# Altium PCB Charging_Dock_PCB.PcbDoc (part 2 of 2)
Units mm, origin at the board's own origin, x right, y up, seen from the top; angles counter-clockwise.
Board outline 320 x 215 mm, 2 copper layers (Top Layer, Bottom Layer); 121 components, 72 nets, 386 pads, 90 vias.
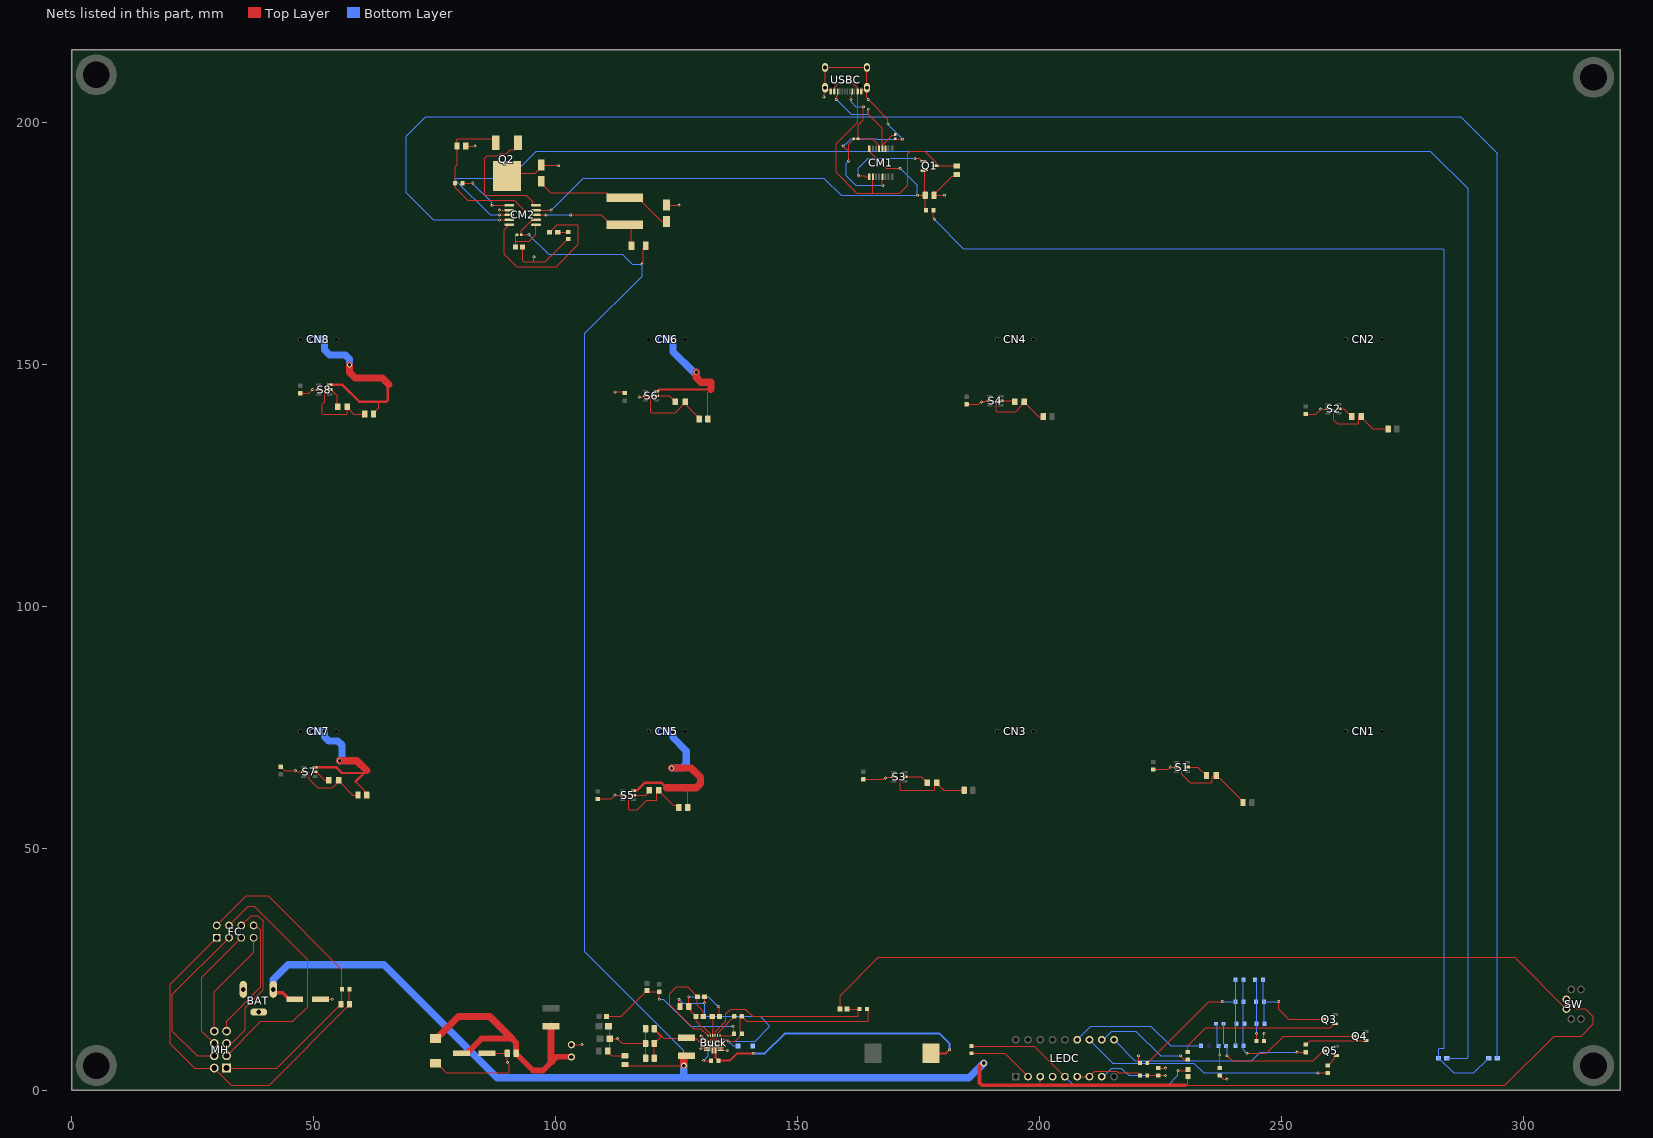
[diagram p2: the nets of this part, all layers, seen from the top]

## Via types
v1: diameter 0.6, hole 0.3, Top Layer to Bottom Layer, 80 vias
v2: diameter 1, hole 0.7, Top Layer to Bottom Layer, 8 vias
v3: diameter 1.27, hole 0.711, Top Layer to Bottom Layer, 1 vias
v4: diameter 1.3, hole 0.8, Top Layer to Bottom Layer, 1 vias

## Nets (pads, with @x,y where several pads share a name; then routed paths per layer and width w, separated by ;. In a path a pad name is that pad's centre, name@x,y a point inside that pad or via, vN(x,y) a via of type N, cw(c..) or ccw(c..) an arc to the next point about the centre after c; other vN are vias at no path point) (continued)
5V_FUSED5: C18.1 CN5.2 CN5.3 S5.6 | length 41.5
  Top Layer w0.254: 126.492,62.484 127.276,61.7 C18.1@127.276,58.42
  Top Layer w0.5: S5.6@116.09,61.91 116.106,61.926 116.79,61.926 118.364,63.5 121.92,63.5 122.936,62.484
  Top Layer w1.5: 122.936,62.484 126.492,62.484 129.08,62.484 129.959,63.363 129.959,64.605 128.016,66.548 v2(123.952,66.548)
  Bottom Layer w1.5: CN5.3@121.75,74.143 CN5.2@124.25,74.143 124.25,72.854 127,70.104 127,67.427 126.121,66.548 v2(123.952,66.548)
5V_FUSED6: C23.1 CN6.2 CN6.3 S6.6 | length 35.3
  Top Layer w0.254: C23.1@131.456,138.684 131.456,144.156 132.08,144.78
  Top Layer w0.5: S6.6@120.869,144.436 121.139,144.436 121.155,144.452 121.155,144.487 121.448,144.78 132.08,144.78
  Top Layer w1.5: v2(129.032,148.336) 129.032,147.32 130.052,146.3 132.08,146.3 132.08,144.78
  Bottom Layer w1.5: CN6.3@121.75,155.143 CN6.2@124.25,155.143 124.25,152.61 128.524,148.336 v2(129.032,148.336)
5V_FUSED7: C25.1 CN7.2 CN7.3 S7.6 | length 35.5
  Top Layer w0.254: 58.674,63.754 60.594,61.834 60.594,61.326 C25.1@60.96,60.96
  Top Layer w0.5: S7.6@50.257,66.712 54.7,66.712 55.88,65.532 60.452,65.532 ; 58.674,63.754 60.452,65.532 ; 60.96,66.04 60.452,65.532
  Top Layer w1.5: v2(55.372,68.072) 58.928,68.072 60.96,66.04
  Bottom Layer w1.5: CN7.3@49.75,74.143 CN7.2@52.25,74.143 52.25,73.015 53.129,72.136 55.001,72.136 55.88,71.257 55.88,68.58 v2(55.372,68.072)
5V_FUSED8: C27.1 CN8.2 CN8.3 S8.6 | length 42.6
  Top Layer w0.254: C27.1@62.368,139.7 62.368,139.88 63.5,141.012 63.5,142.24
  Top Layer w0.5: S8.6@53.34,145.73 55.946,145.73 59.436,142.24 63.5,142.24 65.024,142.24 65.317,142.533 65.317,146.011 65.317,146.021 65.35,146.054
  Top Layer w1.5: v2(57.404,149.86) 57.404,148.336 58.586,147.154 64.174,147.154 65.317,146.011 65.532,145.796
  Bottom Layer w1.5: CN8.3@49.75,155.143 CN8.2@52.25,155.143 52.25,152.982 53.34,151.892 56.525,151.892 57.404,151.013 v2(57.404,149.86)
5V_FUSEDPI: C34.2 C35.1 J1.C PF2.2 Pi.1 | length 56.2
  Top Layer w1.2: C35.1@80.512,7.62 81.662,7.62 84.71,10.668 90.932,10.668 91.787,9.813 91.787,7.575 95.298,4.064 97.37,4.064 99.231,5.925 100.221,6.915 103.206,6.915 Pi.1@103.264,6.858
  Top Layer w1.5: J1.C@75.184,10.678 75.384,10.678 79.946,15.24 86.36,15.24 90.932,10.668 ; PF2.2@99.06,13.208 99.06,6.096 99.231,5.925
25P: DR.C LEDC.13 | length 28.4
  Bottom Layer w0.254: LEDC.13@207.772,10.414 210.566,13.208 223.012,13.208 227.076,9.144 DR.C@233.378,9.144
100P: DG1.C DG2.C DG3.C DG4.C R25.1 | length 37.2
  Top Layer w0.254: R25.1@222.241,5.588 222.241,5.617 222.517,5.893 222.546,5.893 234.941,18.288 v1(237.744,18.288)
  Bottom Layer w0.254: v1(237.744,18.288) DG3.C@240.49,18.288 ; DG1.C@240.49,9.144 240.49,13.716 DG3.C@240.49,18.288 ; DG2.C@240.49,22.86 DG3.C@240.49,18.288
AGND: Buck.12 C2.1 C3.1 NT1.1 R2.2 R5.2 R8.2 | length 75.4
  Top Layer w0.2: v1(125.476,18.796) 125.476,17.514 C3.1@125.718,17.272 ; v1(130.783,18.007) R2.2@130.783,19.304
  Top Layer w0.254: Buck.12@134.529,10.547 135.155,10.547 135.542,10.16 v1(135.636,10.16) 137.16,10.16 137.998,10.998 137.998,11.581 R5.2@138.101,11.684 ; R5.2@138.101,11.581 138.101,14.863 138.448,15.21 C2.1@138.448,15.24 139.464,14.224 164.443,14.224 164.592,14.373 164.592,16.501 R8.2@164.329,16.764
  Bottom Layer w0.254: v1(125.476,18.796) 126.265,18.007 v1(130.783,18.007) 130.783,15.521 131.064,15.24 142.24,15.24 144.167,13.313 144.167,13.103 141.2,10.136 v1@135.66,10.136 ; v1(135.636,10.16) v1@135.66,10.136 ; NT1.1@137.668,9.144 136.652,9.144 v1@135.66,10.136
BAT: BAT.1 C1.1 C30.2 CM2.7 LEDC.3 PF1.1 R19.2 R32.1 RCS.2 SW.5 | length 546.5
  Top Layer w0.254: v1(94.488,176.784) R19.2@92.889,176.784 92.889,177.544 95.193,179.848 CM2.7@95.937,179.848 ; C30.2@114.3,5.312 114.589,5.023 126.435,5.023 v3(126.492,5.08) ; v1(117.856,170.688) 117.856,170.963 118.134,171.241 118.134,174.008 RCS.2@118.611,174.485 ; 200.152,1.016 LEDC.3@200.152,2.794 ; 230.053,1.016 230.632,1.016 ; R32.1@230.632,2.821 230.632,1.016 ; SW.5@308.864,18.764 310.755,16.873 312.779,16.873 314.452,15.2 314.452,13.716 311.912,11.176 306.324,11.176 296.164,1.016 230.632,1.016
  Top Layer w0.8: BAT.1@41.656,20.828 41.656,20.461 41.979,20.138 43.606,20.138 44.948,18.796 C1.1@46.098,18.796 ; v4(188.468,5.588) 188.333,5.588 188.083,5.338 188.07,5.338 187.602,4.869 187.602,1.485 188.07,1.016 200.152,1.016 230.053,1.016
  Top Layer w1.5: v3(126.492,5.08) PF1.1@126.492,6.604
  Bottom Layer w0.254: v1(94.488,176.784) 98.552,172.72 113.792,172.72 115.824,170.688 v1(117.856,170.688) 117.856,168.148 106.063,156.355 106.063,28.557 126.492,8.128 v3(126.492,5.08)
  Bottom Layer w1.5: BAT.1@41.656,21.828 41.656,22.86 44.704,25.908 64.516,25.908 87.884,2.54 127,2.54 ; v3(126.492,5.08) 126.492,3.048 127,2.54 ; v4(188.468,5.588) 185.42,2.54 127,2.54
BOOT: Buck.1 C5.1 | length 9.3
  Top Layer w0.25: v1(130.048,11.176) 130.252,11.176 130.881,10.547 Buck.1@131.056,10.547 ; v1(130.556,6.096) C5.1@132.08,6.096
  Bottom Layer w0.25: v1(130.048,11.176) 132.037,9.187 132.037,8.98 131.572,8.515 131.572,7.112 v1(130.556,6.096)
CC1: CM1.P$13 R21.1 USBC.A5 | length 17.8
  Top Layer w0.2: 165.451,196.596 166.748,195.299 166.748,194.664 CM1.P$13@166.848,194.564
  Top Layer w0.254: v1(161.036,204.724) 161.036,205.417 161.217,205.598 USBC.A5@161.217,206.248 ; v1(163.576,203.2) 163.576,200.515 162.485,199.424 R21.1@162.485,196.596 165.451,196.596 165.526,196.596 165.567,196.555
  Bottom Layer w0.254: v1(161.036,204.724) 161.036,204.216 162.052,203.2 v1(163.576,203.2)
CC2: CM1.P$12 R22.1 USBC.B5 | length 23
  Top Layer w0.254: v1(157.988,204.724) 158.054,204.79 158.054,205.392 158.283,205.621 USBC.B5@158.283,205.74 ; v1(164.592,202.692) 164.592,201.676 167.498,198.77 CM1.P$12@167.498,195.237 ; CM1.P$12@167.398,194.989 167.398,195.137 CM1.P$12@167.498,195.237 ; CM1.P$12@167.498,194.564 CM1.P$12@167.498,195.237 ; R22.1@170.18,197.462 170.18,197.449 170.037,197.306 169.566,197.306 CM1.P$12@167.498,195.237
  Bottom Layer w0.254: v1@158.105,204.607 161.036,201.676 164.443,201.676 164.592,201.825 v1(164.592,202.692)
CHRG: CM2.3 DC.1 | length 413.4
  Top Layer w0.254: v1(88.392,180.848) CM2.3@90.424,180.848
  Bottom Layer w0.254: v1(88.392,180.848) 86.448,180.848 79.187,188.109 79.187,188.319 79.336,188.468 90.424,188.468 96.012,194.056 280.775,194.056 288.544,186.287 288.544,6.753 288.395,6.604 DC.1@284.148,6.604
COM: CM2.5 R18.2 | length 35.3
  Top Layer w0.254: CM2.5@90.424,178.848 89.408,177.832 89.408,172.72 91.948,170.18 100.076,170.18 104.648,174.752 104.648,178.667 104.499,178.816 100.292,178.816 98.768,177.292 R18.2@98.718,177.292
DONE: CM2.4 DD.1 | length 452.6
  Top Layer w0.254: v1(88.4,179.84) 90.416,179.84 CM2.4@90.424,179.848
  Bottom Layer w0.254: v1(88.4,179.84) 74.668,179.84 69.088,185.42 69.088,197.119 73.137,201.168 287.02,201.168 294.544,193.644 DD.1@294.544,6.604
Drain: D1.A Q2.2 | length 11.9
  Top Layer w0.2: D1.A@97.028,191.162 100.322,191.162 100.476,191.008 v1(100.584,191.008)
  Top Layer w0.254: Q2.2@89.923,188.901 90.506,189.484 95.763,189.484 97.028,190.749 D1.A@97.028,191.162
EN: Buck.15 R3.2 R8.1 | length 38
  Top Layer w0.254: Buck.15@132.956,11.272 132.956,12.052 135.128,14.224 135.128,15.748 136.144,16.764 139.192,16.764 140.716,15.24 162.411,15.24 162.56,15.389 162.56,16.501 R8.1@162.823,16.764 R3.2@160.247,16.764
FB: Buck.13 C4.2 R5.1 R6.1 R7.2 | length 37.1
  Top Layer w0.2: R6.1@118.872,20.601 119.153,20.32 C4.2@121.412,20.32
  Top Layer w0.254: R7.2@110.463,15.24 113.521,15.24 118.872,20.591 R6.1@118.872,20.601 ; v1(121.412,18.796) C4.2@121.412,20.32 ; Buck.13@133.956,11.272 133.956,11.244 133.958,11.242 136.376,11.242 R5.1@136.818,11.684 ; v1(136.652,13.208) 136.652,13.114 136.848,12.918 R5.1@136.848,11.684
  Bottom Layer w0.254: v1(121.412,18.796) 122.285,18.796 127.873,13.208 v1(136.652,13.208)
ILIM1: R9.1 S1.5 | length 4.6
  Top Layer w0.2: S1.5@230.597,66.778 232.7,66.778 234.424,65.054 R9.1@234.424,65.024
ILIM2: R10.1 S2.5 | length 3.2
  Top Layer w0.2: S2.5@261.886,140.782 262.836,140.782 264.396,139.222 R10.1@264.396,139.192
ILIM3: R11.1 S3.5 | length 5.1
  Top Layer w0.2: S3.5@172.177,64.746 175.568,64.746 176.784,63.53 R11.1@176.784,63.5
ILIM4: R13.1 S4.5 | length 2.9
  Top Layer w0.2: S4.5@191.989,142.47 194.57,142.47 R13.1@194.8,142.24
ILIM5: R12.1 S5.5 | length 3.6
  Top Layer w0.2: S5.5@116.09,60.96 118.662,60.96 119.344,61.642 R12.1@119.344,61.672
ILIM6: R14.1 S6.5 | length 4.4
  Top Layer w0.2: S6.5@120.869,143.486 123.496,143.486 124.742,142.24 R14.1@124.792,142.24
ILIM7: R15.1 S7.5 | length 3.5
  Top Layer w0.2: S7.5@50.257,65.762 50.423,65.596 50.745,65.596 52.333,64.008 R15.1@53.068,64.008
MODE: Buck.18 R1.1 R2.1 | length 24.7
  Top Layer w0.25: R1.1@130.502,15.24 130.502,16.31 129.313,17.499 R2.1@129.313,19.304 129.303,19.304 127.271,21.336 124.968,21.336 123.548,19.916 123.548,17.676 128.524,12.7 130.028,12.7 131.281,11.447 131.456,11.447 Buck.18@131.456,11.272
NetC28_1: C28.1 CM2.1 | length 11.9
  Top Layer w0.254: C28.1@80.772,187.452 v1(82.804,187.452) ; v1(86.868,182.848) CM2.1@90.424,182.848
  Bottom Layer w0.254: v1(82.804,187.452) 86.802,183.454 86.802,182.914 v1(86.868,182.848)
NetC31_2: C31.2 R18.1 | length 2.2
  Top Layer w0.2: R18.1@100.418,177.292 C31.2@102.616,177.292
NetCM2_6: CM2.6 R19.1 R20.2 | length 9.6
  Top Layer w0.254: R20.2@91.721,174.244 91.721,175.369 ; R19.1@92.023,176.784 92.01,176.784 91.721,176.495 91.721,175.369 ; CM2.6@95.937,178.848 95.937,176.709 94.597,175.369 91.721,175.369
NetCM2_8: CM2.8 L2.2 RCS.1 | length 24.4
  Top Layer w0.254: CM2.8@95.937,180.848 v1(98.044,180.848) ; v1(103.124,180.848) 109.418,180.848 111.45,178.816 L2.2@114.3,178.816 114.881,178.816 115.654,178.043 RCS.1@115.654,174.485
  Bottom Layer w0.254: v1(98.044,180.848) v1(103.124,180.848)
NetCM2_10: CM2.10 Q2.1 | length 27.9
  Top Layer w0.254: Q2.1@92.208,195.748 92.208,195.048 91.535,194.375 90.59,194.375 89.763,193.548 88.534,193.548 88.026,193.04 85.852,193.04 85.344,192.532 85.344,185.061 85.493,184.912 93.98,184.912 95.32,183.572 95.32,182.973 95.445,182.848 CM2.10@95.937,182.848
NetD1_C: D1.C D2.C L2.1 | length 29.7
  Top Layer w0.254: D1.C@97.028,187.806 97.028,187.394 99.002,185.42 110.528,185.42 110.677,185.271 110.677,185.189 111.45,184.416 117.15,184.416 117.923,183.643 117.923,183.441 121.839,179.525 D2.C@122.936,179.525
NetDC_2: DC.2 DD.2 R17.1 | length 291
  Top Layer w0.254: R17.1@178.072,181.864 178.072,180.366 178.308,180.13 v1(178.308,180.037)
  Bottom Layer w0.254: v1(178.308,180.037) 178.308,179.832 184.263,173.877 283.456,173.877 283.605,173.728 283.605,8.636 282.597,8.636 282.448,8.487 DC.2@282.448,6.604 282.498,6.604 285.546,3.556 289.746,3.556 DD.2@292.794,6.604
NetDG1_A: DG1.A DG2.A DG3.A DG4.A Q4.3 | length 39.1
  Top Layer w0.254: v1(242.824,7.62) 246.888,7.62 250.444,11.176 Q4.3@264.957,11.176
  Bottom Layer w0.254: DG2.A@242.11,22.86 DG3.A@242.11,18.288 242.11,13.716 DG1.A@242.11,9.144 242.11,8.334 v1(242.824,7.62)
NetFC_3: FC.3 MH.4 | length 34.9
  Top Layer w0.254: MH.4@29.464,7.112 25.908,7.112 20.828,12.192 20.828,19.812 FC.3@32.512,31.496
NetFC_4: FC.4 MH.3 | length 53.1
  Top Layer w0.254: MH.3@32.004,7.112 39.116,14.224 45.72,14.224 48.768,17.272 48.768,26.924 37.697,37.995 36.471,37.995 FC.4@32.512,34.036
NetFC_5: FC.5 MH.6 | length 26.3
  Top Layer w0.254: MH.6@29.464,9.652 26.924,12.192 26.924,23.368 FC.5@35.052,31.496
NetFC_6: FC.6 MH.5 | length 34.8
  Top Layer w0.254: MH.5@32.004,9.652 32.269,9.917 33.285,9.917 35.864,12.496 35.864,17.068 39.56,20.764 39.56,34.967 38.459,36.068 37.084,36.068 FC.6@35.052,34.036
NetFC_7: FC.7 MH.8 | length 22.7
  Top Layer w0.254: MH.8@29.464,12.192 29.464,20.32 37.592,28.448 FC.7@37.592,31.496
NetFC_8: FC.8 MH.7 | length 25.7
  Top Layer w0.254: MH.7@32.004,12.192 32.004,14.224 39.116,21.336 39.116,33.02 38.358,33.778 37.85,33.778 FC.8@37.592,34.036
NetLEDC_5: LEDC.5 R31.2 R32.2 | length 50
  Top Layer w0.254: R31.2@185.928,9.126 198.9,9.126 LEDC.5@205.232,2.794 ; v1(228.6,4.064) 230.405,4.064 R32.2@230.632,4.291
  Bottom Layer w0.254: LEDC.5@205.232,2.794 207.01,1.016 226.568,1.016 228.6,3.048 v1(228.6,4.064)
NetLEDC_6: LEDC.6 LEDC.7 R30.2 | length 13.8
  Top Layer w0.254: LEDC.6@207.772,2.794 LEDC.7@210.312,2.794 211.429,3.911 215.992,3.911 216.347,3.556 220.227,3.556 220.43,3.353 220.459,3.353 220.735,3.077 R30.2@220.735,3.048
NetLEDC_8: LEDC.8 R29.2 R30.1 | length 18.4
  Top Layer w0.254: R30.1@222.241,3.077 R30.1@222.241,3.048 224.518,3.048 R29.2@224.536,3.066 v1@226.042,3.066
  Bottom Layer w0.254: LEDC.8@212.852,2.794 213.106,2.794 214.884,4.572 216.916,4.572 218.44,3.048 v1(226.06,3.048)
NetLEDC_10: LEDC.10 R26.1 | length 42.1
  Top Layer w0.254: v1(253.22,7.856) R26.1@255.016,7.856
  Bottom Layer w0.254: LEDC.10@215.392,10.414 219.71,6.096 243.84,6.096 245.6,7.856 v1(253.22,7.856)
NetLEDC_11: LEDC.11 R24.1 | length 20.9
  Top Layer w0.254: v1(229.108,7.112) 229.888,6.332 R24.1@230.632,6.332
  Bottom Layer w0.254: LEDC.11@212.852,10.414 213.106,10.414 214.884,12.192 219.917,12.192 224.997,7.112 v1(229.108,7.112)
NetLEDC_12: LEDC.12 R28.1 | length 52.1
  Top Layer w0.254: v1(257.556,3.556) R28.1@259.588,3.556
  Bottom Layer w0.254: LEDC.12@210.312,10.414 215.138,5.588 231.855,5.588 233.887,3.556 v1(257.556,3.556)
NetLY_A: LY.A Q5.3 UY.A | length 28.4
  Top Layer w0.254: v1(238.76,7.112) 239.776,6.096 256.594,6.096 258.626,8.128 Q5.3@258.861,8.128
  Bottom Layer w0.254: UY.A@238.086,13.837 238.086,9.552 238.76,8.878 v1(238.76,7.112)
NetLY_C: LY.C R27.1 UY.C | length 9.8
  Top Layer w0.254: R27.1@237.229,4.217 v1(237.229,7.322)
  Bottom Layer w0.254: UY.C@236.685,13.755 236.685,9.566 236.721,9.53 236.721,9.417 237.229,8.909 v1(237.229,7.322)
NetMG1_A: MG1.A MG2.A MG3.A Q3.3 | length 23.9
  Top Layer w0.254: v1(249.428,18.288) 249.428,16.764 251.526,14.666 Q3.3@258.642,14.666
  Bottom Layer w0.254: MG1.A@246.174,22.86 246.174,18.534 MG3.A@246.42,18.288 ; MG2.A@246.476,13.716 246.476,18.232 MG3.A@246.42,18.288 ; v1(249.428,18.288) MG3.A@246.42,18.288
NetMG1_C: MG1.C MG2.C MG3.C R23.1 | length 12.8
  Top Layer w0.254: R23.1@244.856,10.16 v1(244.856,11.684)
  Bottom Layer w0.254: MG1.C@244.554,22.86 244.832,22.582 244.832,18.216 244.856,18.192 MG2.C@244.856,13.716 v1(244.856,11.684)
NetQ3_1: Q3.1 R24.2 | length 33.6
  Top Layer w0.254: R24.2@230.632,7.892 230.632,9.144 234.356,12.868 260.028,12.868 260.877,13.716 Q3.1@261.112,13.716
NetQ4_1: Q4.1 R26.2 | length 12.7
  Top Layer w0.254: R26.2@255.016,9.416 255.046,9.416 255.856,10.226 Q4.1@267.427,10.226
NetQ5_1: Q5.1 R28.2 | length 2.9
  Top Layer w0.254: R28.2@259.588,5.116 259.618,5.116 259.926,5.424 259.926,5.454 260.923,6.451 260.923,7.005 261.096,7.178 Q5.1@261.331,7.178
NetR3_1: R3.1 SW.6 | length 160.5
  Top Layer w0.254: R3.1@158.777,16.764 158.777,19.531 166.678,27.432 298.196,27.432 SW.6@308.864,16.764
NetR16_1: R16.1 S8.5 | length 4.3
  Top Layer w0.2: S8.5@53.34,144.78 53.61,144.78 54.864,143.526 R16.1@54.864,141.224
NRFGND: C36.2 C37.2 FC.1 MH.2 | length 76.5
  Top Layer w0.254: FC.1@29.972,31.496 20.384,21.908 20.384,9.588 25.4,4.572 MH.2@29.464,4.572 33.02,1.016 40.805,1.016 57.404,17.615 C36.2@57.404,17.78 C37.2@57.404,20.828
NRFVCC: C36.1 C37.1 FC.2 MH.1 | length 71.1
  Top Layer w0.254: FC.2@29.972,34.036 36.068,40.132 40.64,40.132 55.844,24.928 C37.1@55.844,20.828 55.844,17.996 C36.1@55.628,17.78 55.628,17.617 55.23,17.22 55.068,17.22 42.42,4.572 MH.1@32.004,4.572
PGND: BAT.2 BAT.3 Buck.3 Buck.4 Buck.5 Buck.8 Buck.9 Buck.10 C1.2 C6.2 C7.2 C8.2 C9.1 C10.1 C11.2 C12.2 C13.2 C14.2 C15.1 C16.2 C17.2 C18.2 C19.2 C20.2 C21.2 C22.2 C23.2 C24.2 C25.2 C26.2 C27.2 C29.1 C30.1 C31.1 C32.1 C33.1 C34.1 C35.2 CM1.P$5 CM2.2 CN1.1 CN1.4 CN2.1 CN2.4 CN3.1 CN3.4 CN4.1 CN4.4 CN5.1 CN5.4 CN6.1 CN7.1 CN7.4 CN8.1 CN8.4 D2.A J1.A LEDC.2 LEDC.4 NT1.2 Pi.2 R9.2 R10.2 R11.2 R12.2 R13.2 R14.2 R15.2 R16.2 R20.1 R21.2 R22.2 R23.2 R25.2 R27.2 R29.1 R31.1 S1.2 S2.2 S3.2 S4.2 S5.2 S6.2 S7.2 S8.2 USBC.1 USBC.2 USBC.3 USBC.4 USBC.A1B12 USBC.B1A12 | length 356.2
  Top Layer w0.2: v1(46.228,66.04) 46.336,66.04 46.614,65.762 S7.2@47.959,65.762 48.929,65.762 49.046,65.645 49.046,64.238 50.8,62.484 53.848,62.484 54.628,63.264 R15.2@54.628,64.008 ; v1(49.784,144.78) S8.2@51.042,144.78 51.816,144.78 52.324,144.272 52.324,142.299 51.816,141.791 51.816,139.817 51.933,139.7 56.815,139.7 56.932,139.817 56.932,141.102 R16.2@56.932,141.224 ; C1.2@51.438,18.796 v1(53.848,18.796) ; J1.A@75.184,5.578 75.384,5.578 77.406,3.556 90.307,3.556 90.424,3.673 90.424,5.293 v1(90.032,5.685) C34.1@90.032,7.62 C35.2@85.852,7.62 ; Pi.2@103.264,9.398 v1(105.41,9.398) ; C11.2@110.744,8.128 111.165,8.549 C10.1@111.165,10.668 ; C10.1@110.744,10.668 C10.1@111.165,10.668 ; C9.1@110.933,13.208 111.165,12.976 C10.1@111.165,10.668 ; v1(112.268,60.96) S5.2@113.792,60.96 114.691,60.96 115.062,60.589 115.062,58.029 115.179,57.912 116.84,57.912 118.872,59.944 120.904,59.944 R12.2@120.904,61.672 ; v1(112.268,144.272) 112.273,144.267 114.069,144.267 C22.2@114.3,144.036 ; v1(117.348,143.256) 117.948,143.256 118.012,143.32 118.405,143.32 S6.2@118.571,143.486 119.541,143.486 119.658,143.369 119.658,140.095 119.775,139.978 124.738,139.978 126.492,141.732 R14.2@126.492,142.24 ; C8.2@118.596,6.604 C7.2@118.596,9.652 ; C6.2@118.596,12.7 C7.2@118.596,9.652 ; v1(130.048,8.636) 130.156,8.636 130.293,8.772 Buck.4@131.331,8.772 ; Buck.5@131.331,8.222 Buck.4@131.331,8.772 ; Buck.3@131.331,9.322 Buck.4@131.331,8.772 ; Buck.10@134.156,9.397 Buck.10@134.081,9.322 Buck.9@134.081,8.772 Buck.8@134.081,8.222 v1(135.542,8.222) ; CM1.P$5@167.498,188.714 167.498,187.194 167.64,187.052 v1(167.64,186.944) ; v1(168.148,64.516) 168.263,64.631 169.764,64.631 S3.2@169.879,64.746 170.149,64.746 170.533,64.362 170.539,64.362 171.196,63.705 171.196,62.093 171.313,61.976 178.209,61.976 178.326,62.093 178.326,63.482 R11.2@178.344,63.5 ; v1(187.96,142.24) 188.668,142.24 188.855,142.427 189.648,142.427 189.772,142.304 190.436,142.304 191.008,141.732 191.008,140.325 191.125,140.208 195.072,140.208 196.36,141.496 R13.2@196.36,142.24 ; v1(227.076,66.778) S1.2@228.299,66.778 229.221,66.778 229.338,66.661 229.338,65.302 231.14,63.5 235.595,63.5 235.712,63.617 235.712,64.752 R9.2@235.984,65.024 ; v1(258.064,140.716) 258.097,140.749 259.555,140.749 S2.2@259.588,140.782 260.538,140.782 260.825,140.495 260.825,138.463 261.62,137.668 265.839,137.668 265.956,137.785 R10.2@265.956,139.192 ; C10.1@111.165,10.668 v1(112.776,10.668) 113.792,9.652 C7.2@118.596,9.652
  Top Layer w0.254: C24.2@43.18,66.82 43.21,66.82 43.99,66.04 v1(46.228,66.04) ; C26.2@47.244,144 49.004,144 v1(49.784,144.78) ; R15.2@55.136,64.008 55.136,63.886 58.062,60.96 C25.2@59.16,60.96 ; R16.2@56.932,141.102 58.334,139.7 C27.2@60.568,139.7 ; C29.1@81.428,195.072 v1(83.312,195.072) ; v1(88.408,181.848) CM2.2@90.424,181.848 ; R20.1@93.191,174.244 93.191,171.345 93.34,171.196 95.504,171.196 ; v1(95.504,172.212) 95.504,171.196 ; C31.1@102.616,175.892 102.566,175.892 97.87,171.196 95.504,171.196 ; C14.2@108.712,60.18 111.488,60.18 v1(112.268,60.96) ; C11.2@110.744,8.128 110.744,7.948 111.58,7.112 C30.1@114.3,7.112 ; R12.2@121.342,61.976 121.342,61.854 124.306,58.889 125.049,58.889 125.476,58.462 C18.2@125.476,58.42 ; D2.A@122.936,182.88 v1(125.476,182.88) ; R14.2@126.764,142.24 127.203,141.801 127.203,141.317 129.656,138.864 C23.2@129.656,138.684 ; v1(155.448,205.232) 155.514,205.298 155.514,206.987 USBC.1@155.675,207.148 ; USBC.B1A12@156.825,206.346 156.825,206.628 156.708,206.745 156.078,206.745 USBC.1@155.675,207.148 ; v1(159.403,195.072) 159.92,194.555 160.029,194.555 160.528,194.056 ; v1(160.528,192.024) 160.528,194.056 ; R21.2@161.619,196.596 161.606,196.596 161.463,196.453 161.463,196.44 160.528,195.505 160.528,194.056 ; USBC.A1B12@163.175,206.346 163.175,206.628 163.292,206.745 163.922,206.745 USBC.4@164.325,207.148 ; C12.2@163.576,64.244 167.782,64.244 168.054,64.516 v1(168.148,64.516) ; v1(168.656,199.644) 168.656,200.66 v1(164.592,204.724) 164.592,204.818 164.325,205.085 USBC.4@164.325,207.148 ; R22.2@170.18,196.596 170.235,196.541 171.65,196.541 v1(171.704,196.487) ; R11.2@178.746,63.5 178.746,63.378 180.148,61.976 C19.2@184.404,61.976 ; v1(180.34,184.912) C33.1@178.192,184.912 178.192,185.092 181.937,188.837 182.485,188.837 C32.1@182.88,189.232 ; C20.2@184.912,141.732 187.452,141.732 v1(187.96,142.24) ; R31.1@185.928,7.62 192.786,7.62 LEDC.2@197.612,2.794 ; R13.2@196.868,142.24 196.868,142.118 199.794,139.192 C21.2@200.776,139.192 ; v1(220.472,7.112) 220.472,5.851 R25.2@220.735,5.588 ; C16.2@223.52,66.276 226.574,66.276 v1(227.076,66.778) ; R29.1@224.536,4.572 v1(226.06,4.572) ; R9.2@236.492,65.024 236.492,64.902 236.931,64.462 237.194,64.462 242.04,59.616 C13.2@242.04,59.436 ; R27.2@237.236,3.066 237.265,3.066 238.036,2.295 v1(238.76,2.295) ; R23.2@246.362,10.16 v1@246.362,11.666 ; C17.2@255.016,139.7 257.048,139.7 v1(258.064,140.716) ; R10.2@266.464,139.192 266.464,139.07 268.882,136.652 C15.1@272.012,136.652 ; USBC.1@155.675,207.148 USBC.2@155.675,211.328 USBC.3@164.325,211.328 USBC.4@164.325,207.148
  Bottom Layer w0.254: v1(159.403,195.072) 159.92,195.589 160.029,195.589 161.036,196.596 166.269,196.596 166.378,196.487 v1(171.704,196.487) 171.704,196.541 168.656,199.589 v1(168.656,199.644) ; v1(160.528,192.024) 160.02,191.516 160.02,188.976 162.052,186.944 v1(167.64,186.944)
  other v1: 246.38,11.684
PGOOD: Buck.16 R4.1 | length 4.1
  Top Layer w0.25: R4.1@132.361,15.24 132.536,15.065 132.536,12.268 132.506,12.238 132.506,11.571 132.456,11.521 Buck.16@132.456,11.272
SEL: CM1.P$11 | length 0.1
  Top Layer w0.2: CM1.P$11@168.148,194.564 CM1.P$11@168.248,194.664
Source: C28.2 C29.2 C33.2 CM1.P$16 CM2.9 Q1.2 Q2.3 R17.2 | length 145.9
  Top Layer w0.254: Q2.3@87.638,195.749 87.638,195.923 86.965,196.596 79.756,196.596 79.607,196.447 79.607,196.209 79.628,196.188 C29.2@79.628,195.072 79.628,191.181 79.212,190.765 C28.2@79.212,187.452 79.212,186.472 81.796,183.888 91.448,183.888 93.488,181.848 CM2.9@95.937,181.848 v1(99.044,181.848) ; CM1.P$16@164.798,194.564 164.971,194.391 164.971,193.818 168.289,190.5 v1(171.196,190.5) ; v1(174.752,184.912) C33.2@176.235,184.912 ; Q1.2@176.037,190.058 176.069,190.058 176.235,189.892 C33.2@176.235,184.912 ; C33.2@176.392,184.912 C33.2@176.235,184.912 ; R17.2@176.512,181.864 176.392,181.984 176.392,184.404 176.235,184.561 C33.2@176.235,184.912
  Bottom Layer w0.254: v1(99.044,181.848) 105.664,188.468 155.448,188.468 159.004,184.912 v1(174.752,184.912) 174.752,186.944 v1(171.196,190.5)
SS: Buck.14 C2.2 | length 5.4
  Top Layer w0.25: Buck.14@133.456,11.272 133.456,11.737 135.578,13.859 135.578,13.9 136.888,15.21 C2.2@136.888,15.24
SW: Buck.6 Buck.7 C5.2 L1.1 | length 60
  Top Layer w0.4: Buck.6@132.406,8.972 Buck.7@133.006,8.972 133.006,6.76 133.64,6.126 C5.2@133.64,6.096 136.013,6.096 137.537,7.62 v1(140.914,7.62) ; L1.1@177.608,7.62 180.624,7.62 v1(181.356,8.352)
  Bottom Layer w0.4: v1(140.914,7.62) 143.256,7.62 147.32,11.684 179.324,11.684 181.356,9.652 v1(181.356,8.352)
VBUS: C32.2 CM1.P$2 Q1.3 USBC.A4B9 USBC.B4A9 | length 65.2
  Top Layer w0.254: USBC.B4A9@157.587,206.346 157.636,206.395 157.636,207.205 157.988,207.557 157.988,207.772 158.496,208.28 161.15,208.28 162.4,207.03 162.4,206.359 USBC.A4B9@162.413,206.346 162.413,200.005 157.988,195.58 157.988,189.633 162.261,185.36 165.548,185.36 ; CM1.P$2@165.548,188.714 165.548,185.36 ; C32.2@182.88,191.008 Q1.3@178.547,191.008 178.547,191.785 176.276,194.056 173.228,194.056 172.72,193.548 172.72,186.944 171.136,185.36 165.548,185.36
VBUSG: CM1.P$1 Q1.1 | length 18.4
  Top Layer w0.25: v1(162.56,188.976) 162.627,188.909 163.738,188.909 163.933,188.714 CM1.P$1@164.798,188.714 ; v1(174.244,192.532) 175.165,192.532 175.739,191.958 Q1.1@176.037,191.958
  Bottom Layer w0.25: v1(162.56,188.976) 162.56,190.5 164.592,192.532 v1(174.244,192.532)
VIN: Buck.2 Buck.11 C6.1 C7.1 C8.1 PF1.2 | length 22.4
  Top Layer w0.2: C8.1@120.396,6.604 120.396,9.811 120.848,10.263 121.007,10.263 121.83,11.086 ; C6.1@120.396,12.7 120.396,12.541 120.848,12.089 121.007,12.089 121.837,11.259 ; C6.1@120.838,12.078 121.83,11.086 ; PF1.2@125.893,10.713 122.383,10.713 121.837,11.259 ; Buck.2@131.331,9.972 131.706,9.972 131.856,10.122 131.856,10.31 131.906,10.36 131.906,10.447 132.132,10.672 133.28,10.672 133.556,10.397 133.556,10.122 133.706,9.972 Buck.11@134.081,9.972 ; 121.83,11.086 121.837,11.093 121.837,11.259
  Top Layer w0.254: PF1.2@125.893,10.713 128.987,10.713 129.886,9.814 Buck.2@131.064,9.814
VREG5: Buck.17 C3.2 R1.2 R4.2 | length 19.5
  Top Layer w0.25: v1(127.508,19.304) C3.2@127.508,17.272 127.917,16.863 127.917,16.345 129.022,15.24 R1.2@129.032,15.24 129.032,14.196 130.078,13.15 130.463,13.15 131.906,11.707 131.906,11.571 131.956,11.521 Buck.17@131.956,11.272
  Top Layer w0.254: v1(133.604,17.272) 133.604,17.178 133.831,16.951 R4.2@133.831,15.24
  Bottom Layer w0.25: v1(127.508,19.304) 131.572,19.304 133.831,17.045
pads on no net: CM1.P$3 CM1.P$4 CM1.P$6 CM1.P$7 CM1.P$8 CM1.P$9 CM1.P$10 CM1.P$14 CM1.P$15 CN6.4 LEDC.1 LEDC.9 LEDC.14 LEDC.15 LEDC.16 LEDC.17 LEDC.18 S1.4 S2.4 S3.4 S4.4 S5.4 S6.4 S7.4 S8.4 SW.1 SW.2 SW.3 SW.4 USBC. USBC.A6 USBC.A7 USBC.A8 USBC.B6 USBC.B7 USBC.B8

## Polygon pours and split planes (outlines as drawn)
PGND on Bottom Layer "PGND_L02_P001" (solid, pour order 1): 17,0 275.844,0 275.844,200 17,200
PGND on Bottom Layer "PGND_L02_P003" (solid, pour order 3): 154.432,214.884 165.608,214.884 165.608,199.644 154.432,199.644

## Silkscreen, mask and mechanical layers (free items; w line width, h text height)
Top Overlay:
  text "-" at 26.67,30.48 h1.52